# Altium PCB CH32X035F8U-R0-1v1.PcbDoc
Units mil, origin at the board's own origin, x right, y up, seen from the top; angles counter-clockwise.
Board outline 1377.95 x 1771.65 mil, 2 copper layers (Top Layer, Bottom Layer); 29 components, 33 nets, 129 pads, 100 vias.
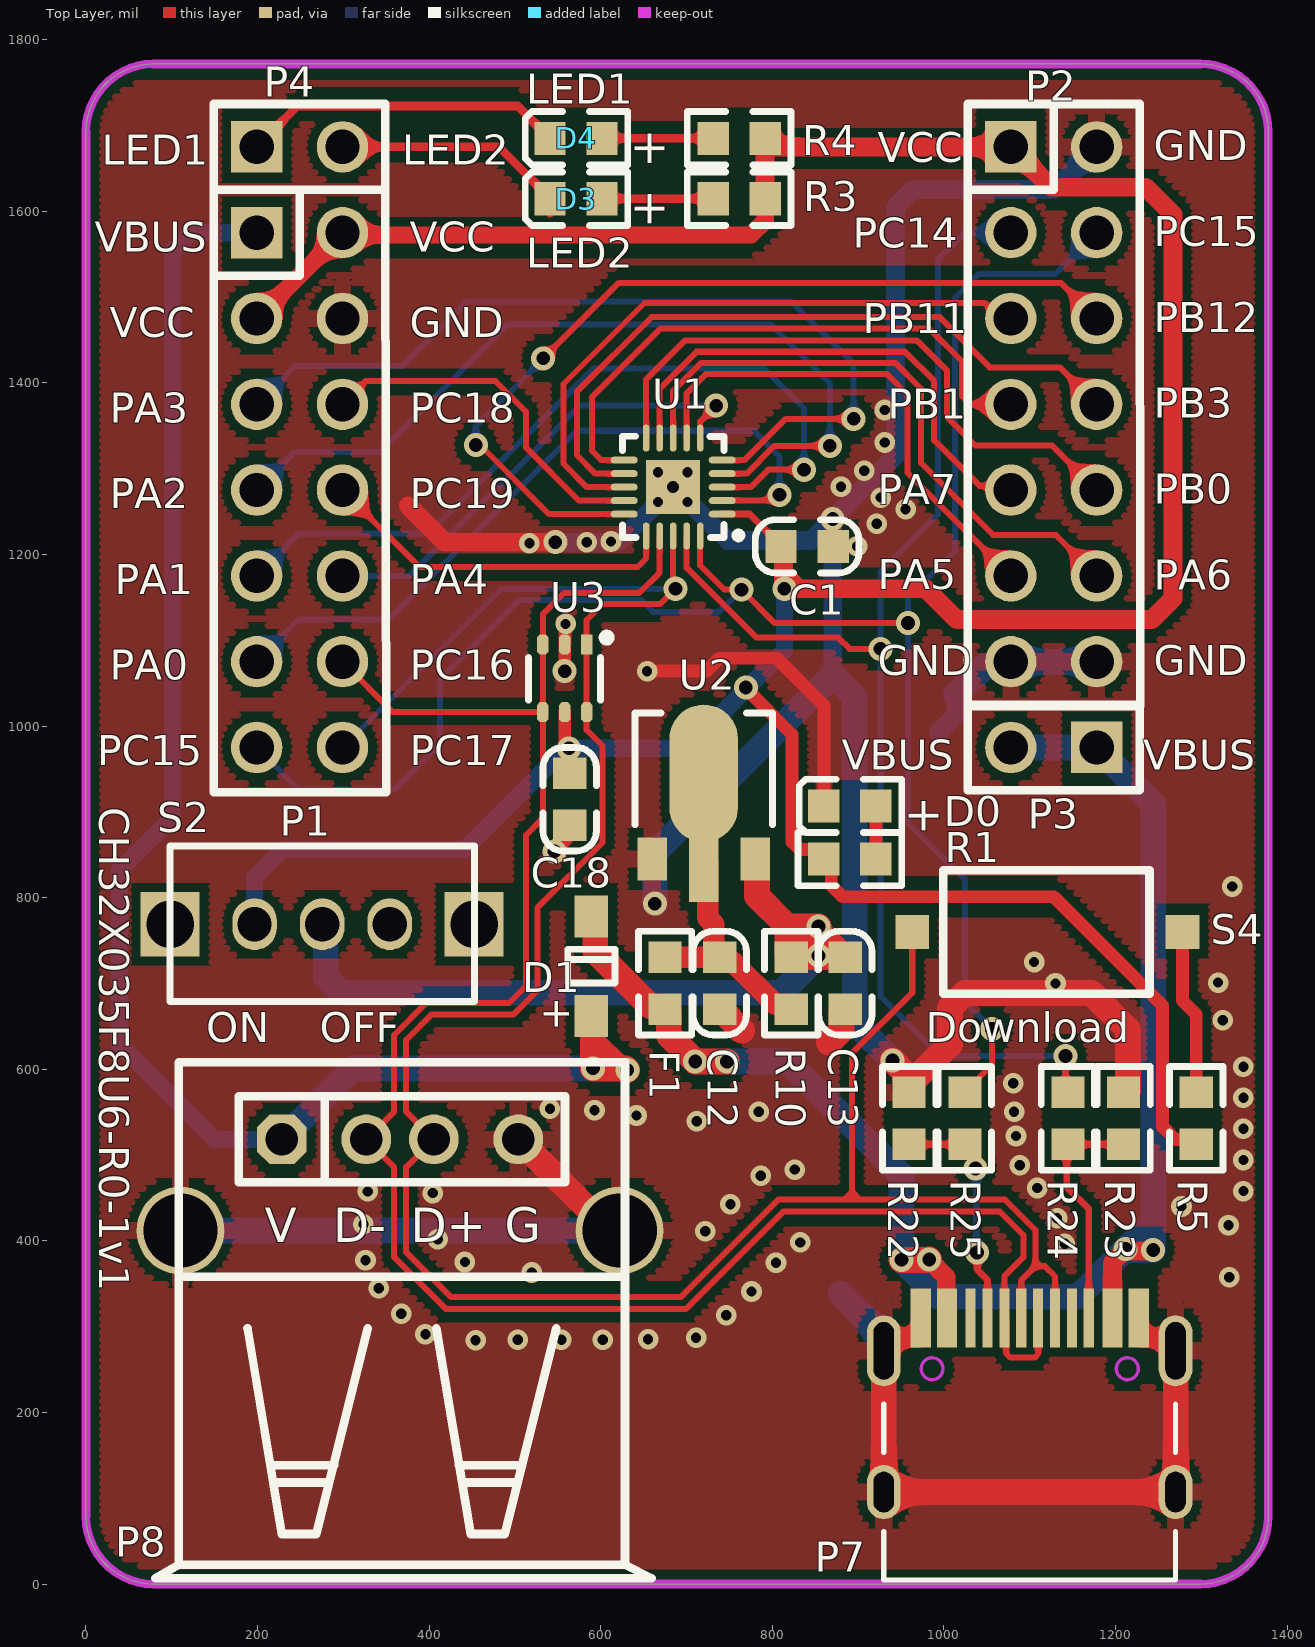
[diagram p0: Top Layer view]
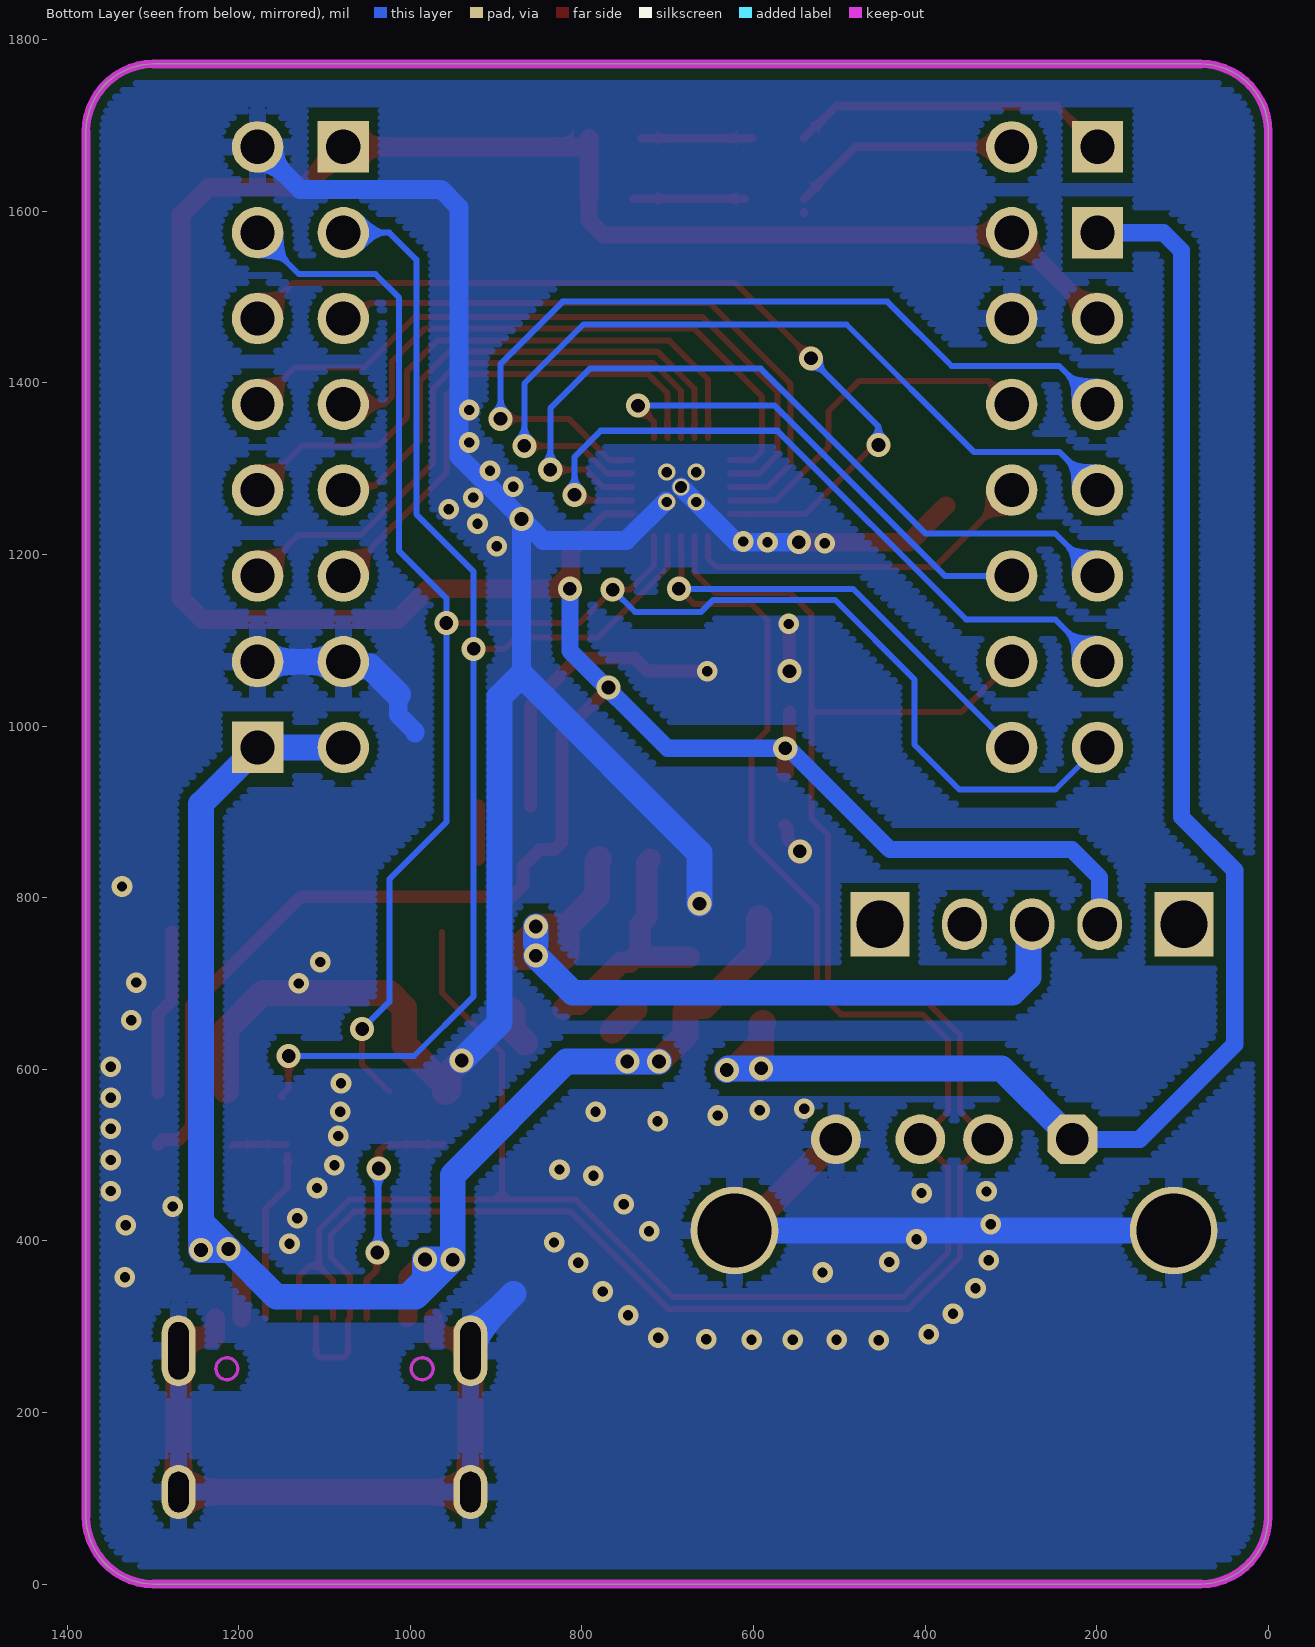
[diagram p1: Bottom Layer view, seen from below]

## Layer stack, top to bottom
Top Solder: solder mask 0.4, Solder Resist, Dk 3.5
Top Layer: signal copper 1.4
Dielectric1: dielectric 12.6, FR-4, Dk 4.8
Bottom Layer: signal copper 1.4
Bottom Solder: solder mask 0.4, Solder Resist, Dk 3.5

## Board outline
0,78.74 ccw(c78.74,78.74) 78.74,0 1299.21,0 ccw(c1299.21,78.74) 1377.95,78.74 1377.95,1692.91 ccw(c1299.21,1692.91) 1299.21,1771.65 78.74,1771.65 ccw(c78.74,1692.91) 0,1692.91

## Design rules (kind name [scope] priority, off if disabled: settings)
Clearance Clearance_1 [InPolygon] p1: gap=10 ignorepadtopadclearanceinfootprint=FALSE except(0: Arc-Hole Track-Hole SMDPad-Hole THPad-Hole Via-Hole Fill-Hole Poly-Hole Region-Hole Text-Hole)
Clearance [All] p2: gap=6 ignorepadtopadclearanceinfootprint=FALSE except(0: Arc-Hole Track-Hole SMDPad-Hole THPad-Hole Via-Hole Fill-Hole Poly-Hole Region-Hole Text-Hole)
ComponentClearance [All] p1 off: gap=10 collisioncheckmode=3 verticalgap=10 showdistances=FALSE
DiffPairsRouting [All] p1: maxlimit=10 minlimit=7 mostfreqgap=8 toplayer_minwidth=15 toplayer_maxwidth=15 toplayer_prefwidth=15 bottomlayer_minwidth=15 bottomlayer_maxwidth=15 bottomlayer_prefwidth=15 maxuncoupledlength=500
MinimumSolderMaskSliver [All] p1 off: minsoldermaskwidth=10
PolygonConnect PolygonConnect_1 [IsVia] p1: connectstyle=Direct reliefconductorwidth=10 reliefentries=4 polygonreliefangle="90 Angle" airgapwidth=10
PolygonConnect [All] p2: connectstyle=Relief reliefconductorwidth=20 reliefentries=4 polygonreliefangle="90 Angle" airgapwidth=10
RoutingVias [All] p1: holewidth=16 width=28 viastyle="Through Hole" minholewidth=12 minwidth=24 maxholewidth=28 maxwidth=50
SilkToSilkClearance [All] p1 off: silktosilkclearance=10
SilkToSolderMaskClearance [IsPad] p1 off: minsilkscreentomaskgap=10 clearancetoexposedcopper=TRUE
SolderMaskExpansion [All] p1: expansion=2 istentingtop=FALSE
Width [All] p1: maxlimit=100 minlimit=6 preferedwidth=10
25 further rules are at their usual default settings.

## Components (designator, comment, footprint, x,y, rotation, side; value= is the part's Value field where it differs from the comment)
C1 "0.1uF" 0603_C 870.73,1209.47 r180 top
C12 "10uF" 0603_C 738.67,730.63 r270 top
C13 "10uF" 0603_C 885,730.63 r270 top
C18 "0.1uF" 0603_C 563.84,884.37 r90 top
D0 "POWER  red" 0603+ 920.63,907 r180 top
D1 "Diode" SOD-123 589,662 r90 top
D3 "LED2" 0603+ 601.46,1614.6 r180 top
D4 "LED1" 0603+ 601.46,1685 r180 top
F1 "500mA" 0603 675,670 r90 top
P1 "Header 7X2" IDC14-2.54mm 199,1575 r0 top
P2 "Header 7X2" IDC14-2.54mm 1077.95,1675 r0 top
P3 "HEADER 2" SIP2-2.54mm 1177.95,975 r90 top
P4 "Header 2" SIP2-2.54mm 199,1675 r270 top
P7 "TYPE-C" TYPE-C-Receptacle-2.0 1099.92,310 r0 top
P8 "USB_A" USBAF 228.29,518.31 r0 top
R1 "1K" 0603 920.63,845 r180 top
R3 "1K" 0603 791.63,1614.6 r180 top
R4 "1K" 0603 791.63,1685 r180 top
R5 "4.7K" 0603 1294,512.42 r90 top
R10 "NC(0Ω)" 0603 822,730.63 r270 top value=10K
R22 "5.1K" 0603 959.41,512.42 r90 top
R23 "5.1K" 0603 1209.41,512.42 r90 top
R24 "0Ω" 0603 1144.41,573.05 r270 top
R25 "0Ω" 0603 1024.41,512.42 r90 top
S2 "SW" SW1 275.26,769 r180 top
S4 "Download" SMD_6.1x3.65x2.5mm-KEY 1278,760 r180 top
U1 "CH32X035F8U6" QFN20_3X3 684.42,1278.5 r90 top
U2 "HT7533" SOT-89 660,845 r0 top
U3 "CH412K" SOT-363 583.59,1095 r180 top

## Footprints (in the part's own frame and the unit in brackets; to place one, negate y for a bottom-side part, rotate by r counter-clockwise, add the part's x,y. Pads: shape width x height; smd on the part's side, far side on the other; paste and mask are expansions set on the pad)
0603 [mm]
  rect 0.93x0.98 smd: 1(0,0) 2(1.54,0)
  silkscreen extent -0.76,-0.79 2.3,0.79
0603+ [mm]
  rect 0.93x0.98 smd: 1(0,0) 2(1.54,0)
  silkscreen extent -0.76,-0.79 2.27,0.79
0603_C [mm]
  rect 0.93x0.98 smd mask+0.051: 1(0,0) 2(1.54,0)
  silkscreen extent -0.76,-0.79 2.31,0.79
IDC14-2.54mm [mil]
  rect 60x60 hole 40: 1(0,0)
  round 60 hole 40: 2(100,0) 3(0,-100) 4(100,-100) 5(0,-200) 6(100,-200) 7(0,-300) 8(100,-300) 9(0,-400) 10(100,-400) 11(0,-500) 12(100,-500) 13(0,-600) 14(100,-600)
  silkscreen extent -50,-652 151,50
QFN20_3X3 [mm]
  rect 1.6x1.6 smd mask+0.051: 0(0,0)
  round 0.508 hole 0.356: 0(0,0)
  oval 0.2x0.8 smd mask+0.051: 1(-0.8,-1.451) 2(-0.4,-1.451) 3(0,-1.451) 4(0.4,-1.451) 5(0.8,-1.451) 11(0.8,1.451) 12(0.4,1.451) 13(0,1.451) 14(-0.4,1.451) 15(-0.8,1.451)
  oval 0.8x0.2 smd mask+0.051: 6(1.451,-0.8) 7(1.451,-0.4) 8(1.451,0) 9(1.451,0.4) 10(1.451,0.8) 16(-1.451,0.8) 17(-1.451,0.4) 18(-1.451,0) 19(-1.451,-0.4) 20(-1.451,-0.8)
  silkscreen extent -1.53,-2.03 1.5,1.5
SIP2-2.54mm [mil]
  rect 60x60 hole 40: 1(0,0)
  round 60 hole 40: 2(0,100)
  silkscreen extent -50,-50 50,150
SMD_6.1x3.65x2.5mm-KEY [mm]
  rect 1x1 smd: 1(0,0) 2(8,0)
  silkscreen extent 0.98,-1.83 7.08,1.83
SOD-123 [mm]
  rect 1.25x1 smd: 1(0,0) 2(2.95,0)
  silkscreen extent 0.98,-0.7 1.97,0.7
SOT-89 [mil]
  rect 34x50 smd: 1(0,0) 3(120,0)
  rect 34x100 smd: 2(60,0)
  oval 80x160 smd: ""(60,100)
  silkscreen extent -20,40 140,170
SOT-363 [mm]
  rect 0.35x0.6 smd mask+0.051: 1(0,0)
  oct 0.35x0.6 smd mask+0.051: 2(0.65,0) 3(1.3,0) 4(1.3,2) 5(0.65,2) 6(0,2)
  silkscreen extent -0.7,-0.31 1.73,1.65
SW1 [mm]
  rect 1.75x1.9 hole 1.4: 0(-4.5,0) 0(4.5,0)
  oval 1.321x1.524 hole 1.016: 1(0,0) 2(-2,0) 3(2,0)
  silkscreen extent -4.51,-2.31 4.5,2.29
TYPE-C-Receptacle-2.0 [mm]
  oval 1x1.6 hole 0.6 slot 1.2 at 90 deg: 0(-4.32,-5.15) 0(4.32,-5.15)
  oval 1x2.1 hole 0.6 slot 1.7 at 90 deg: 0(-4.32,-0.97) 0(4.32,-0.97)
  rect 0.6x1.75 smd mask+0.051: A1(-3.225,0) A4(-2.45,0) B1(3.225,0) B4(2.45,0)
  rect 0.3x1.75 smd mask+0.051: A5(-1.25,0) A6(-0.25,0) A7(0.25,0) A8(1.25,0) B5(1.75,0) B6(0.75,0) B7(-0.75,0) B8(-1.75,0)
  Keep-Out Layer circle w0.1: c-2.89,-1.5 r0.325
  Keep-Out Layer circle w0.1: c2.89,-1.5 r0.325
  silkscreen extent -4.32,-7.75 4.32,-2.55
USBAF [mm]
  round 2.6 hole 2.2: 0(-3,-2.7) 0(10,-2.7)
  oct 1.473x1.473 hole 0.965: 1(0,0)
  round 1.473 hole 0.965: 2(2.5,0) 3(4.5,0) 4(7,0)
  silkscreen extent -3.75,-12.99 10.95,2.29

## Part data
C1 C18: library part Cap, "Capacitor"
C12 C13: library part CAP, "Capacitor"
D0 D3 D4: library part LED0, "Typical INFRARED GaAs LED", LatestRevisionDate=08-Jul-2005, LatestRevisionNote="Mech Layer 1 removed.", PackageReference=LED-0, Published=8-Jun-2000, Publisher="Altium Limited"
D1: "Default Diode", Code_JEDEC=DO-214-AB, LatestRevisionDate=17-Jul-2002, LatestRevisionNote="Re-released for DXP Platform.", PackageReference=SMC, PackageVersion=Sep-1996, Published=8-Jun-2000, Publisher="Altium Limited"
F1: library part FUSE1, "Fuse"
P1 P2: "Header, 7-Pin, Dual row", LatestRevisionDate=17-Jul-2002, LatestRevisionNote="Re-released for DXP Platform.", Publisher="Altium Limited"
P3 P4: "Header, 2-Pin"
  P4: LatestRevisionDate=17-Jul-2002, LatestRevisionNote="Re-released for DXP Platform.", Publisher="Altium Limited"
P7: library part TYPE-C1
P8: library part USB, "USB Port"
R1 R3 R4: library part "Res Semi", "Semiconductor Resistor", LatestRevisionDate=17-Jul-2002, LatestRevisionNote="Re-released for DXP Platform.", PackageReference=AXIAL-0.5, Published=8-Jun-2000, Publisher="Altium Limited"
R5 R10 R22 R23 R24 R25: library part Res2, "Resistor"
  R10: LatestRevisionDate=17-Jul-2002, LatestRevisionNote="Re-released for DXP Platform.", PackageReference=AXIAL-0.4, Published=8-Jun-2000, Publisher="Altium Limited"
S4: library part KEY1
U1: "RISC-V MCU with USB/PD/ADC/SPI/I2C/UART/OA"
U2: library part 1117-3.3V
U3: "Qaud ESD protect, high speed"

## Via types
v1: diameter 24, hole 12, Top Layer to Bottom Layer, tented both sides, 62 vias
v2: diameter 28, hole 16, Top Layer to Bottom Layer, tented both sides, 34 vias
v3: diameter 20, hole 12, Top Layer to Bottom Layer, tented both sides, 4 vias

## Nets (pads, with @x,y where several pads share a name; then routed paths per layer and width w, separated by ;. In a path a pad name is that pad's centre, name@x,y a point inside that pad or via, vN(x,y) a via of type N, cw(c..) or ccw(c..) an arc to the next point about the centre after c; other vN are vias at no path point)
5V: C12.1 F1.2 R10.2 U2. U2.2 | length 293.8
  Top Layer w25: F1.2 C12.1@737.68,730.63 ; U2.2 724.5,840.5 724.5,776.5 731.88,769.12 731.88,736.44 C12.1@737.68,730.63 ; R10.2 816.19,675.81 803.19,675.81 754.18,724.82 744.47,724.82 C12.1 C12.1@737.68,730.63
CC1: P2.3 R24.1 U1.19 | length 1583.5
  Top Layer w7: U1.19 700.17,1184.45 781.62,1103 877,1103 890,1090 v2(926,1090) ; v2(1141.66,615.42) 1141.66,578.01 1150.74,568.94 R24.1@1148.94,567.13
  Bottom Layer w7: P2.3 1024.39,1575 992.88,1543.49 992.88,1246.86 926,1179.98 v2(926,1090) 926,685 995.58,615.42 v2(1141.66,615.42)
CC2: P1.13 P2.4 R25.2 U1.20 | length 2240.2
  Top Layer w7: U1.20 715.91,1187.09 743.68,1159.32 763.68,1159.32 v2(764,1159) 803,1120 v2(958,1120) ; R25.2@1024.39,573.85 1056,605.46 v2(1056,647)
  Bottom Layer w7: P1.13 248,926 360,926 412.5,978.5 412.5,1054.5 505,1147 647,1147 661,1133 738,1133 v2(764,1159) ; v2(1056,647) 1024.39,678.61 1024.39,821.61 958,888 v2(958,1120) 958,1148.86 1012.88,1203.73 1012.88,1499.05 1040.69,1526.86 1129.82,1526.86 P2.4
GND: C1.1 C12.2 C13.2 C18.1 D0.2 P1.4 P2.2 P2.13 P2.14 P7.0 P7.A1 P7.B1 P8.0 P8.4 R22.2 R23.2 U1.0 U2.1 U3.2 | length 5024
  Top Layer w15: v2(546,854) 560,868 560,880.53 C18.1 ; v2@558,1067 U3.2 558.5,1095.5 558.5,1118.5 v1(559,1119) ; v1(654,1064) 723.22,1064 738.22,1079 805,1079 860,1024 D0.2
  Top Layer w22: P1.4@305.22,1468.78 P1.4@305.22,1473.14 ; 375.66,1256.71 418.1,1214.27 v2(547.11,1214.27) ; P7.0@929.84,271.81 929.84,278.53 937.87,286.55 972.14,286.55 972.95,287.36 P7.A1 ; P7.B1 1226.89,287.36 1227.7,286.55 1261.98,286.55 1270,278.53 P7.0@1270,271.81
  Top Layer w30: P8.4 610.18,412.01 P8.0@621.99,412.01 ; C12.2 739.65,670 764.65,645 ; 866,631 880.71,645.71 880.71,666.69 884.02,670 C13.2 ; P7.0@929.84,271.81 929.84,107.24 1270,107.24 P7.0@1270,271.81 ; v2(940,610.14) 955.12,595.02 955.12,576.35 958.42,573.05 R22.2 ; R22.2@963.7,585.63 1007,628.93 1007,671.4 1024.57,688.97 1171.8,688.97 1214.41,646.36 R23.2@1214.41,574.88
  Bottom Layer w22: v2(547.11,1214.27) v1(583.65,1214.27) 620.18,1214.27 U1.0@684.42,1278.5 ; v3@702.18,1262.23 748.04,1216.37 845.27,1216.37 v2(870.32,1241.42) ; 870.32,1059.44 v2(870.32,1241.42) ; 994.34,991.89 994.34,993.51 1014,1013.17 1014,1036.49 ; P2.2 1128.3,1625.35 964.03,1625.35 943.37,1604.69 943.37,1314.47 v2(870.32,1241.42)
  Bottom Layer w30: P8.0@108,414.46 110.45,412.01 P8.0@621.99,412.01 ; v2(663,793) 663,852.11 870.32,1059.44 896,1033.76 896,654.14 v2(940,610.14) ; 879.62,338.24 919.71,298.15 922.62,298.15 929.84,290.93 P7.0@929.84,271.81 ; 1014,1036.49 1046.77,1069.26 1072.21,1069.26 P2.13 P2.14
  other v1: 454.1,284.25 503.13,284.74 554.13,284.74 602.17,284.74 655.15,285.24 711.11,287.22 395.67,291.18 746.14,313.32 367.45,314.95 775.64,341 341.2,344.66 1332.52,357.68 519.44,363.11 441.72,375.33 804.23,374.58 325.85,377.34 1140.69,396.61 832.36,398.18 409.94,401.73 721.64,411.34 1331.62,418.31 323.37,419.44 1131.81,426.43 1276.89,440.02 751.13,442.65 404.04,455.67 328.33,457.57 1349,458 1108.66,461.63 786.53,475.78 826.01,483.04 1088.36,488.27 1349,494.25 1083.92,522.21 1349,530.5 711.71,539.26 641.68,546.04 1081.7,550.43 784.01,550.56 592.73,552.07 540.76,554 1349,566.75 1080.75,583.73 1349,603 1325,657 1130,700 1319.5,701 1105,725 1336,813 899.04,1209.47 516.83,1213 611.89,1215.11 921.64,1235.6 955.27,1252.78 926.4,1266.31 879.97,1278.74 907.02,1297.38 931.06,1330.46 931.06,1368.37
  other v2: 558,1064
  other v3: 666.75,1261.11 701.05,1261.11 666.75,1295.91 701.05,1295.91
LED1: D4.2 P4.1 | length 377.8
  Top Layer w10: P4.1 246.68,1722.68 503.15,1722.68 526.54,1699.29 527.52,1699.29 540.83,1685.98 D4.2
LED2: D3.2 P4.2 | length 268.4
  Top Layer w10: P4.2 481.41,1675 527.52,1628.89 527.52,1627.9 D3.2 ; D3.2@540.83,1597.6 D3.2@540.83,1598.58
NetC13_1: C13.1 R10.1 S2.1 U2.3 | length 1016.5
  Top Layer w30: U2.3 782,843 782,802 817.71,766.29 ; v2(853.71,732.34) v2@853.71,760.94 ; C13.1 C13.1@884.02,730.63 ; 817.71,750.11 819.53,750.11 835.71,766.29 ; 817.71,750.11 817.71,733.94 821.02,730.63 R10.1 C13.1@884.02,730.63 ; 817.71,750.11 817.71,766.29 ; 817.71,766.29 835.71,766.29 ; 835.71,766.29 v2(853.71,766.29) v2@853.71,760.94 ; v2@853.71,760.94 C13.1@884.02,730.63
  Bottom Layer w30: S2.1 279.47,764.79 279.47,707.53 298,689 810.37,689 v2(853.71,732.34) ; v2@853.71,745.71 v2(853.71,766.29)
NetD0_1: D0.1 R1.1 | length 62
  Top Layer w15: R1.1 D0.1
NetD3_1: D3.1 R3.2 | length 129.5
  Top Layer w10: D3.1@610.42,1614.77 R3.2@739.96,1614.77
NetD4_1: D4.1 R4.2 | length 129.5
  Top Layer w10: D4.1 R4.2
NetP7_A5: P7.A5 R22.1 R25.1 | length 273.4
  Top Layer w8: R22.1@961.57,513.36 962.52,512.42 R25.1 ; R25.1@1029.49,511.4 1036.71,504.18 v2(1036.71,484.24) ; v2(1038.43,386.5) 1038.99,385.94 1038.99,366.29 1050.71,354.57 P7.A5
  Bottom Layer w8: v2(1036.71,484.24) 1037.57,483.38 1037.57,387.35 v2(1038.43,386.5)
NetP7_B5: P7.B5 R23.1 R24.2 | length 264.9
  Top Layer w8: R24.2@1143.04,500.22 1143.04,462.91 1168.82,437.13 P7.B5 ; R24.2 1206.18,512.42 R23.1@1207.73,510.87
NetR5_2: R5.2 S4.1 | length 193.6
  Top Layer w15: S4.1 1278,679.93 1294,663.93 R5.2
PA0: P1.11 U1.2 | length 847.6
  Top Layer w7: U1.2 741.72,1262.92 801.94,1262.92 v2(808.45,1269.43)
  Bottom Layer w7: P1.11 248.13,1124.13 352.13,1124.13 572.16,1344.16 778.14,1344.16 808.45,1313.84 v2(808.45,1269.43)
PA1: P1.9 U1.3 | length 932.2
  Top Layer w7: U1.3 774.92,1278.5 795.14,1298.72 v2(836.82,1298.72)
  Bottom Layer w7: P1.9 248.55,1224.55 399.55,1224.55 591.43,1416.43 790.76,1416.43 836.82,1370.37 v2(836.82,1298.72)
PA2: P1.7 U1.4 | length 988
  Top Layer w7: U1.4 770.06,1294.25 802.43,1326.62 v2(867.03,1326.62)
  Bottom Layer w7: P1.7 243.5,1319.5 343.07,1319.5 491.6,1468.03 798.19,1468.03 867.03,1399.2 v2(867.03,1326.62)
PA3: P1.5 U1.5 | length 1012.4
  Top Layer w7: U1.5 767.42,1310 815.41,1357.99 v2(894.7,1357.99)
  Bottom Layer w7: P1.5 243.89,1419.89 369.21,1419.89 443.84,1494.52 822.34,1494.52 894.7,1422.16 v2(894.7,1357.99)
PA4: P1.10 U1.6 | length 563.1
  Top Layer w7: U1.6 715.91,1354.7 v2(734.55,1373.33)
  Bottom Layer w7: P1.10 377,1175 575.33,1373.33 v2(734.55,1373.33)
PA5: P2.11 U1.7 | length 590.1
  Top Layer w7: U1.7 700.17,1387.94 722.46,1410.23 933.73,1410.23 957.57,1386.4 957.57,1295.39 P2.11
PA6: P2.12 U1.8 | length 715.5
  Top Layer w7: U1.8 684.42,1390.58 717.07,1423.23 943.34,1423.23 973.29,1393.28 973.29,1306.72 1057.37,1222.64 1130.32,1222.64 P2.12
PA7: P2.9 U1.9 | length 592.1
  Top Layer w7: U1.9 668.67,1393.21 711.69,1436.23 954.53,1436.23 988.52,1402.24 988.52,1332.87 1041.55,1279.84 1073.11,1279.84 P2.9
PB0: P2.10 U1.10 | length 716.1
  Top Layer w7: U1.10 652.92,1404.08 698.07,1449.23 968.65,1449.23 1003.62,1414.26 1003.62,1360.02 1036.75,1326.9 1126.06,1326.9 P2.10
PB1: P2.7 U1.11 | length 686.4
  Top Layer w7: U1.11 600.49,1310.01 589.9,1320.6 589.9,1383.66 669.7,1463.45 982.5,1463.45 1020.99,1424.96 1020.99,1384.28 1030.27,1375 P2.7
PB3: P2.8 U1.12 | length 821.7
  Top Layer w7: U1.12 593.72,1294.26 572.04,1315.93 572.04,1389.4 659.09,1476.45 994.98,1476.45 1053.28,1418.16 1134.79,1418.16 P2.8
PB11: P2.5 U1.13 | length 742.9
  Top Layer w7: U1.13 583.87,1278.51 556.54,1305.84 556.54,1398.68 650.95,1493.09 1047.35,1493.09 1065.44,1475 P2.5
PB12: P2.6 U1.15 | length 1036
  Top Layer w7: v2(454.33,1327.54) 459.2,1327.54 539.73,1247.02 U1.15 ; v2(532.93,1428.55) 621.03,1516.64 1136.31,1516.64 P2.6
  Bottom Layer w7: v2(454.33,1327.54) 454.33,1349.37 v2@531.47,1426.51
PC16: P1.12 P7.A7 P7.B7 P8.2 U1.17 U3.3 U3.4 | length 2408.9
  Top Layer w7: P1.12 357.74,1016.26 U3.4 ; U1.17 668.67,1178.82 644.85,1155 557,1155 532.41,1130.41 U3.3 U3.4 ; P7.A7 1109.76,268.06 1105.66,263.96 1077.48,263.96 1072.8,268.64 1072.8,307.59 P7.B7 1070.39,358.59 1092.53,380.73 1092.53,406.8 1065.31,434.02 812.86,434.02 699.51,320.67 419.41,320.67 359.09,380.99 359.09,485.94 P8.2 359.09,550.68 359.09,639.89 396.2,677 493,677 513,697 513,873 532.41,892.41 U3.4
PC17: P1.14 P7.A6 P7.B6 P8.3 S4.2 U1.18 U3.1 U3.6 | length 2936.3
  Top Layer w7: U1.18 684.25,1221.2 684.25,1200.65 684,1200.4 684,1157 669,1142 602,1142 583.59,1123.59 U3.1 U3.6 583.59,995.41 602,977 602,864 526,788 526,691.62 498.38,664 403,664 373.09,634.09 373.09,550.68 P8.3 373.09,485.94 373.09,386.79 425.2,334.67 693.72,334.67 807.07,448.02 884,448.02 ; 904,448.02 902,448.02 ; S4.2 963.04,689.04 893,619 893,457.02 ; P7.A6 1090.08,354.02 1106.53,370.48 ; P7.B6 1129.45,358.59 1117.56,370.48 1106.53,370.48 ; 884,448.02 893,457.02 ; 884,448.02 893,448.02 ; 893,448.02 893,457.02 ; 893,448.02 902,448.02 ; 893,457.02 902,448.02 ; 902,448.02 1071.11,448.02 1106.53,412.59 1106.53,370.48
  Bottom Layer w7: P1.14 484,1160 v2(687,1160)
PC18: P1.6 U1.14 | length 421.5
  Top Layer w7: P1.6 325.87,1401.87 477.26,1401.87 512.59,1366.54 512.59,1324.84 574.66,1262.76 U1.14
PC19: P1.8 U1.16 | length 421.5
  Top Layer w7: P1.8 388.88,1185.12 642.79,1185.12 652.92,1195.24 U1.16
VBUS: D1.1 P1.1 P8.1 | length 1862.7
  Top Layer w30: D1.1@589,654 590.77,652.23 590.77,631 ; v2(631,599) 629,601 v2@620.77,601 ; 590.77,631 v2@620.77,601 ; 590.77,631 590.77,601.23 v2(591,601) v2@620.77,601
  Bottom Layer w20: P1.1 122,1575 101,1554 101,894 39,832 39,629 149.69,518.31 P8.1
  Bottom Layer w30: P8.1@231.58,521.6 310.98,601 v2(591,601) 629,601 v2(631,599)
VBUS1: D1.2 F1.1 P3.1 P3.2 P7.A4 P7.B4 | length 2114.2
  Top Layer w22: v2@982.75,377.75 1002.65,357.84 1002.65,310.81 P7.A4 ; P7.B4 1196.38,374.37 v2@1210.18,388.17 ; v2(1211.81,390.46) 1211.81,389.81 v2@1210.18,388.17 ; v2(1243.89,389.32) 1242.74,388.17 v2@1210.18,388.17
  Top Layer w30: D1.2@593,776.14 593.69,775.46 593.69,737.32 657.69,673.31 671.69,673.31 F1.1 675.98,670 679.29,666.69 679.29,639.71 v2(710,609) v2(747,609) ; v2@950.46,377.75 982.75,377.75 v2(982.75,378.18)
  Bottom Layer w30: v2(710,609) v2(747,609) 818,609 950.46,476.54 v2(950.46,377.97) ; P3.2 P3.1 1243.89,909.07 1243.89,422.53 ; 1243.89,464 1243.89,422.53 ; v2(950.46,377.97) 950.67,378.18 v2(982.75,378.18) 982.75,355.15 ; v2(950.46,377.97) 973.28,355.15 ; 973.28,355.15 993.6,334.84 1003.06,334.84 ; 973.28,355.15 982.75,355.15 ; 982.75,355.15 1003.06,334.84 ; 1003.06,334.84 1156.19,334.84 v2@1210.68,389.32 ; v2@1210.68,389.32 v2(1211.81,390.46) 1243.89,422.53 ; v2@1210.68,389.32 v2(1243.89,389.32) 1243.89,422.53
VCC: C1.2 C18.2 P1.2 P1.3 P2.1 R1.2 R3.1 R4.1 R5.1 S2.3 U1.1 U3.5 | length 4162.4
  Top Layer w8: U1.1 773.54,1247.01 799.3,1221.25 C1.2@799.3,1214.15
  Top Layer w15: U3.5 558,982.52 562.92,977.6 v2(562.92,974.08) ; v2(769,1045) 769,1044 823,990 823,864.99 831.79,856.21 849.19,856.21 868.71,836.69 868.71,814.29 882,801 1128,801 1254.89,674.11 1254.89,532.89 1269.79,518 1288.42,518 R5.1
  Top Layer w20: P1.3 P1.2 301.62,1572.38 774.94,1572.38 791.63,1589.08 R3.1 ; v2(562.92,974.08) 562.92,945.92 C18.2
  Top Layer w22: R3.1 R4.1 ; R4.1@800.65,1675 P2.1 1124.95,1628 1235.03,1628 1267,1596.03 1267,1149 1242,1124 1015,1124 979,1160 831,1160 ; C1.2@809.3,1209.28 813,1205.58 813,1178 ; 813,1183.29 813,1178 ; 813,1178 831,1160 ; 813,1178 813,1161 v2(814,1160) 831,1160
  Bottom Layer w15: v2@559.08,974.08 v2(562.92,974.08)
  Bottom Layer w20: S2.3 196.52,823.52 229,856 441,856 v2@559.08,974.08 ; v2(562.92,974.08) 700.25,974.08 814,1087.84 v2(814,1160)
pads on no net: P7.A8 P7.B8 S2.0 S2.2

## Polygon pours and split planes (outlines as drawn)
GND on Bottom Layer "GND" (hatched Horizontal grid 8 track 8, remove dead copper, pour order 1): 0,0 1377.95,0 1377.95,1771.65 0,1771.65
GND on Top Layer "GND" (hatched Horizontal grid 8 track 8, remove dead copper, pour order 0): 0,0 1377.95,0 1377.95,1771.65 0,1771.65

## Keep-outs
Keep-Out Layer:
  the board outline again, w10

## Silkscreen, mask and mechanical layers (free items; w line width, h text height)
Top Overlay:
  text "GND" at 1244.43,1659.31 h35
  text "VCC" at 923.06,1656.99 h35
  text "LED1" at 18.32,1654.26 h35
  text "LED2" at 368.42,1654.26 h35
  text "PC15" at 1244.43,1559.25 h35
  text "PC14" at 893.91,1557.42 h35
  text "VBUS" at 10.47,1553.07 h35
  text "VCC" at 377.49,1553.07 h35
  text "PB12" at 1244.43,1459.19 h35
  text "PB11" at 905.57,1457.85 h35
  text "VCC" at 27.97,1453.25 h35
  text "GND" at 377.49,1453.25 h35
  text "PB3" at 1244.43,1359.13 h35
  text "PB1" at 934.73,1358.29 h35
  text "PA3" at 27.97,1353.42 h35
  text "PC18" at 377.49,1353.42 h35
  text "PA7" at 923.06,1258.72 h35
  text "PB0" at 1244.43,1259.07 h35
  text "PA2" at 27.97,1253.59 h35
  text "PC19" at 377.49,1253.59 h35
  text "PA5" at 923.06,1159.15 h35
  text "PA6" at 1244.43,1159.01 h35
  text "PA1" at 33.8,1153.77 h35
  text "PA4" at 377.49,1153.77 h35
  text "GND" at 923.06,1058.96 h35
  text "GND" at 1244.43,1058.96 h35
  text "PA0" at 27.97,1053.94 h35
  text "PC16" at 377.49,1053.94 h35
  text "PC15" at 13.39,954.12 h35
  text "PC17" at 377.49,954.12 h35
  text "VBUS" at 881,949 h35
  text "VBUS" at 1232,949 h35
  text "CH32X035F8U6-R0-1v1" at 15.26,905.59 h35 r270
  text "ON" at 140.39,631.59 h35
  text "OFF" at 272.47,631.59 h35
Mechanical 1:
  the board outline again, w10

## Text inside footprints (layer, text, board x,y; h text height)
D0: Top Overlay "+" at 958.71,917.99 h40 r270
D1: Top Overlay "+" at 563,644 h35 r90
D3: Top Overlay "+" at 639.54,1625.58 h40 r270
D4: Top Overlay "+" at 639.54,1695.99 h40 r270
P8: Top Overlay "G" at 488.29,398.31 h40; Top Overlay "V" at 208.29,398.31 h40; Top Overlay "D+" at 378.29,398.31 h40; Top Overlay "D-" at 288.29,398.31 h40